# Altium PCB Vario_pcb_2l.PcbDoc (part 1 of 2)
Units mil, origin at the board's own origin, x right, y up, seen from the top; angles counter-clockwise.
Board outline 2755.91 x 1968.5 mil, 2 copper layers (Top Layer, Bottom Layer), stack 34.296 mil thick; 124 components, 101 nets, 543 pads, 304 vias.
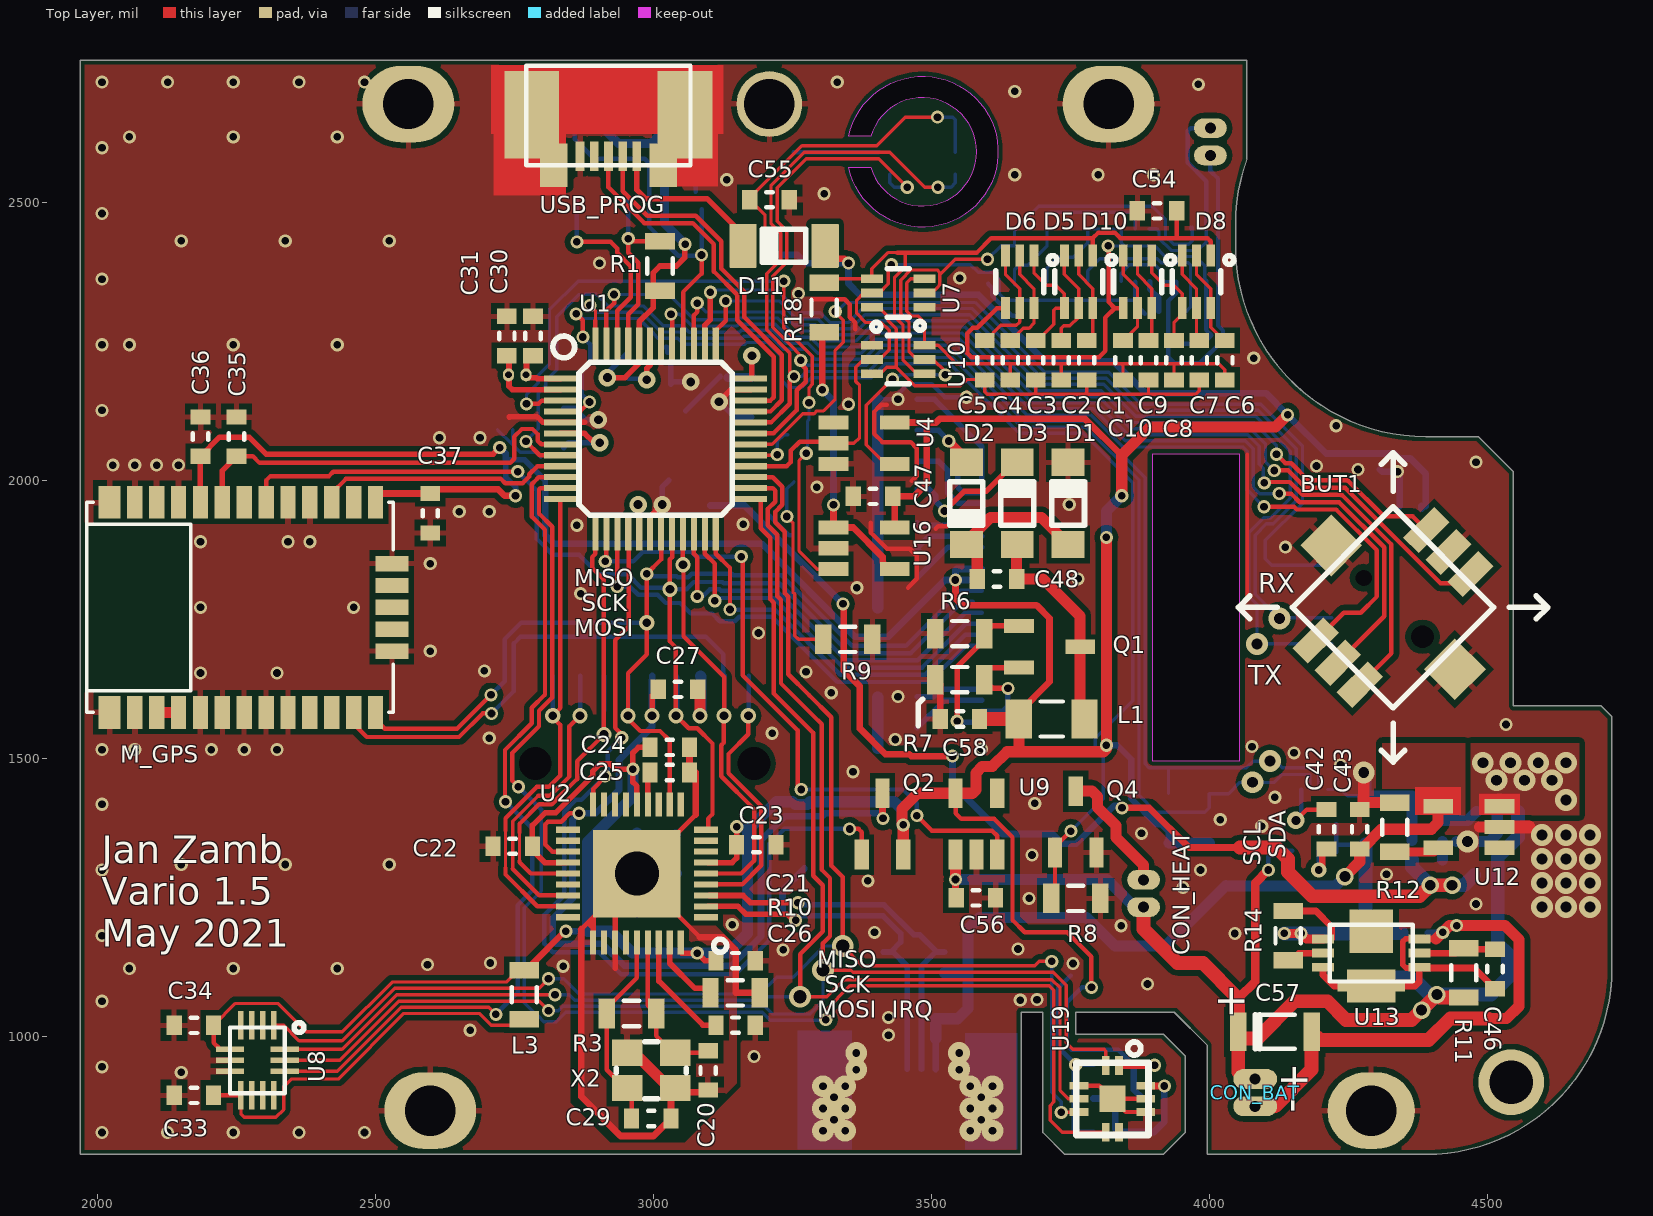
[diagram p0: Top Layer view]
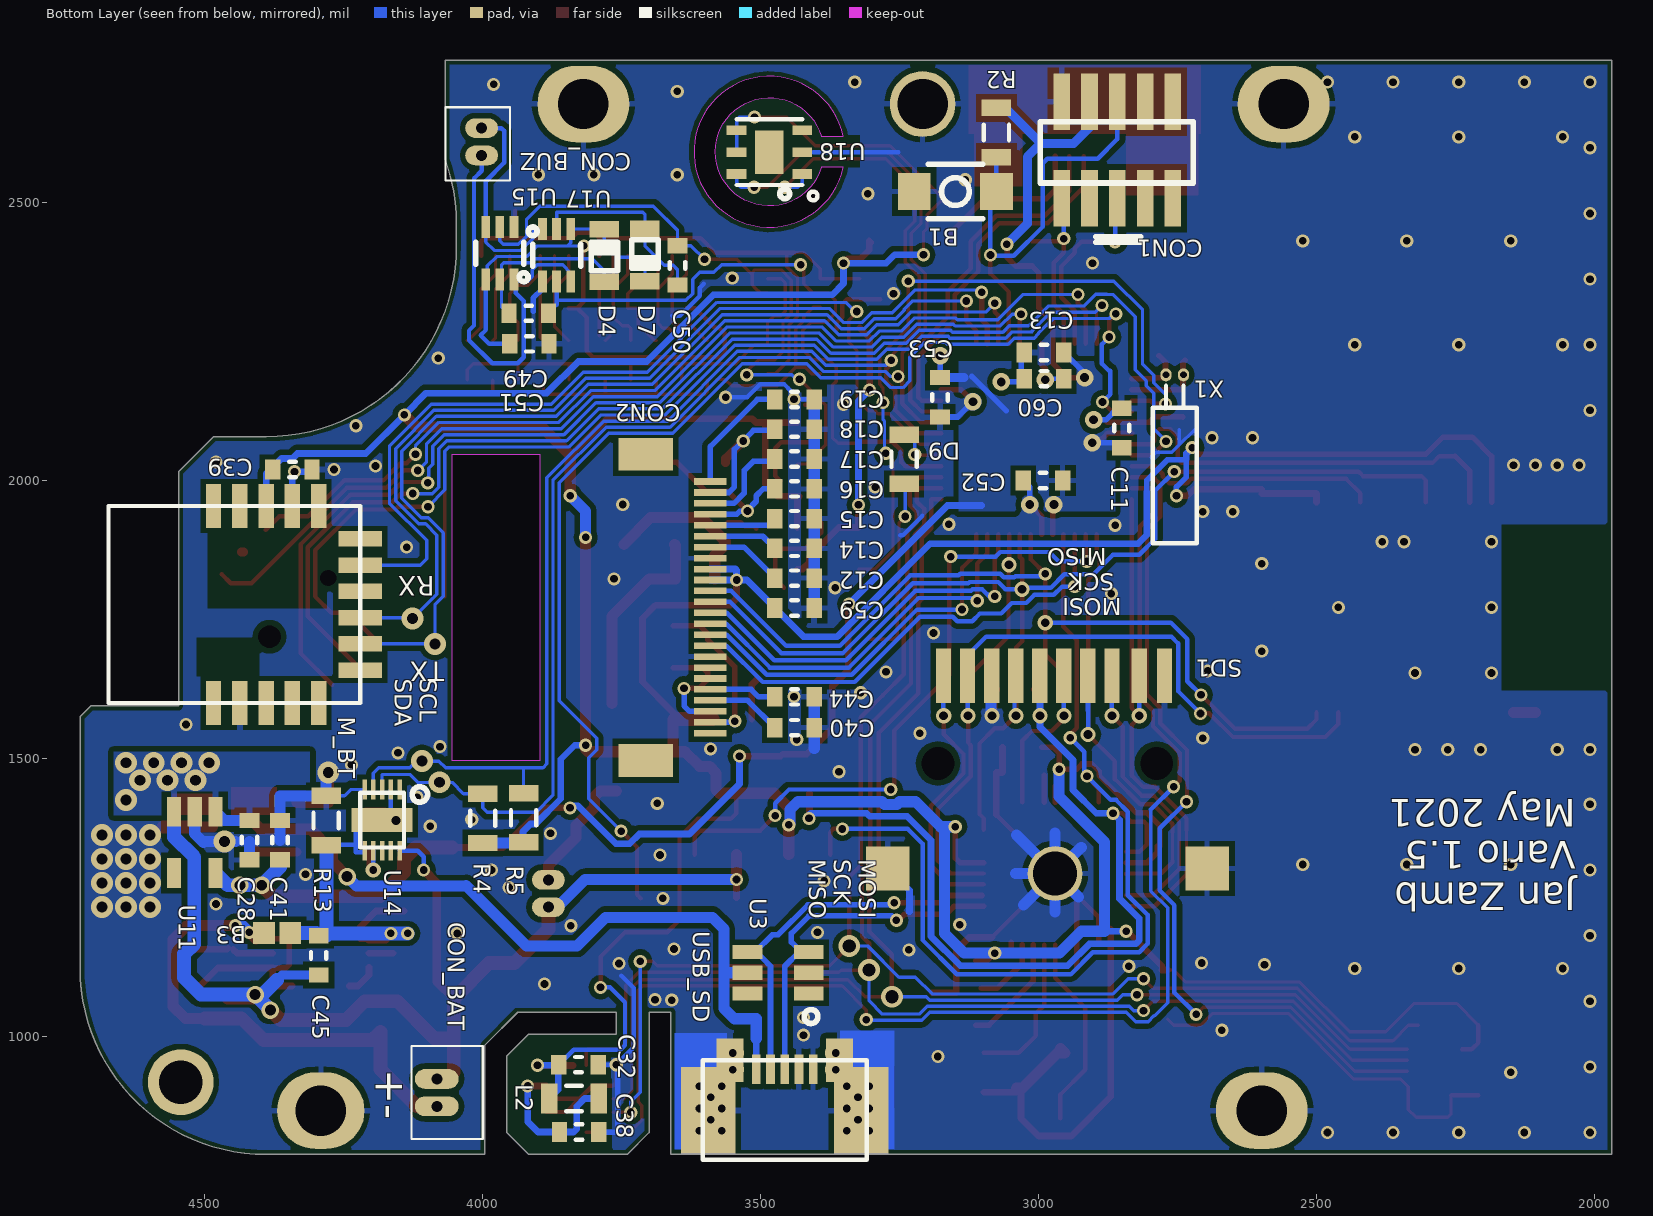
[diagram p1: Bottom Layer view, seen from below]
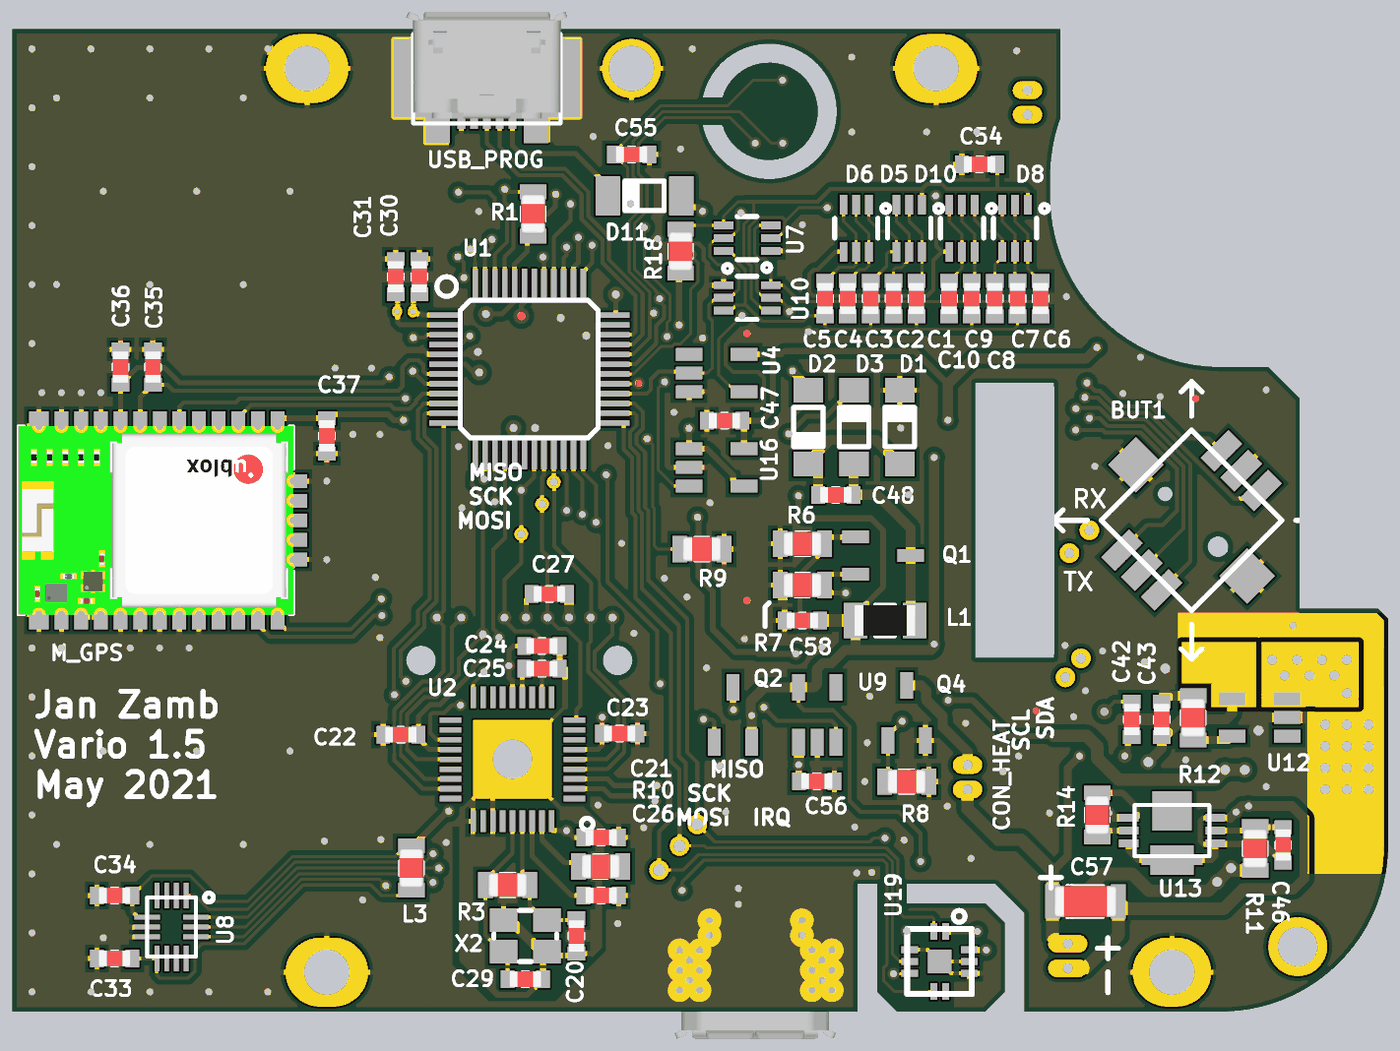
[diagram p3: 3D render of the assembled board from above, using the file's embedded part models]
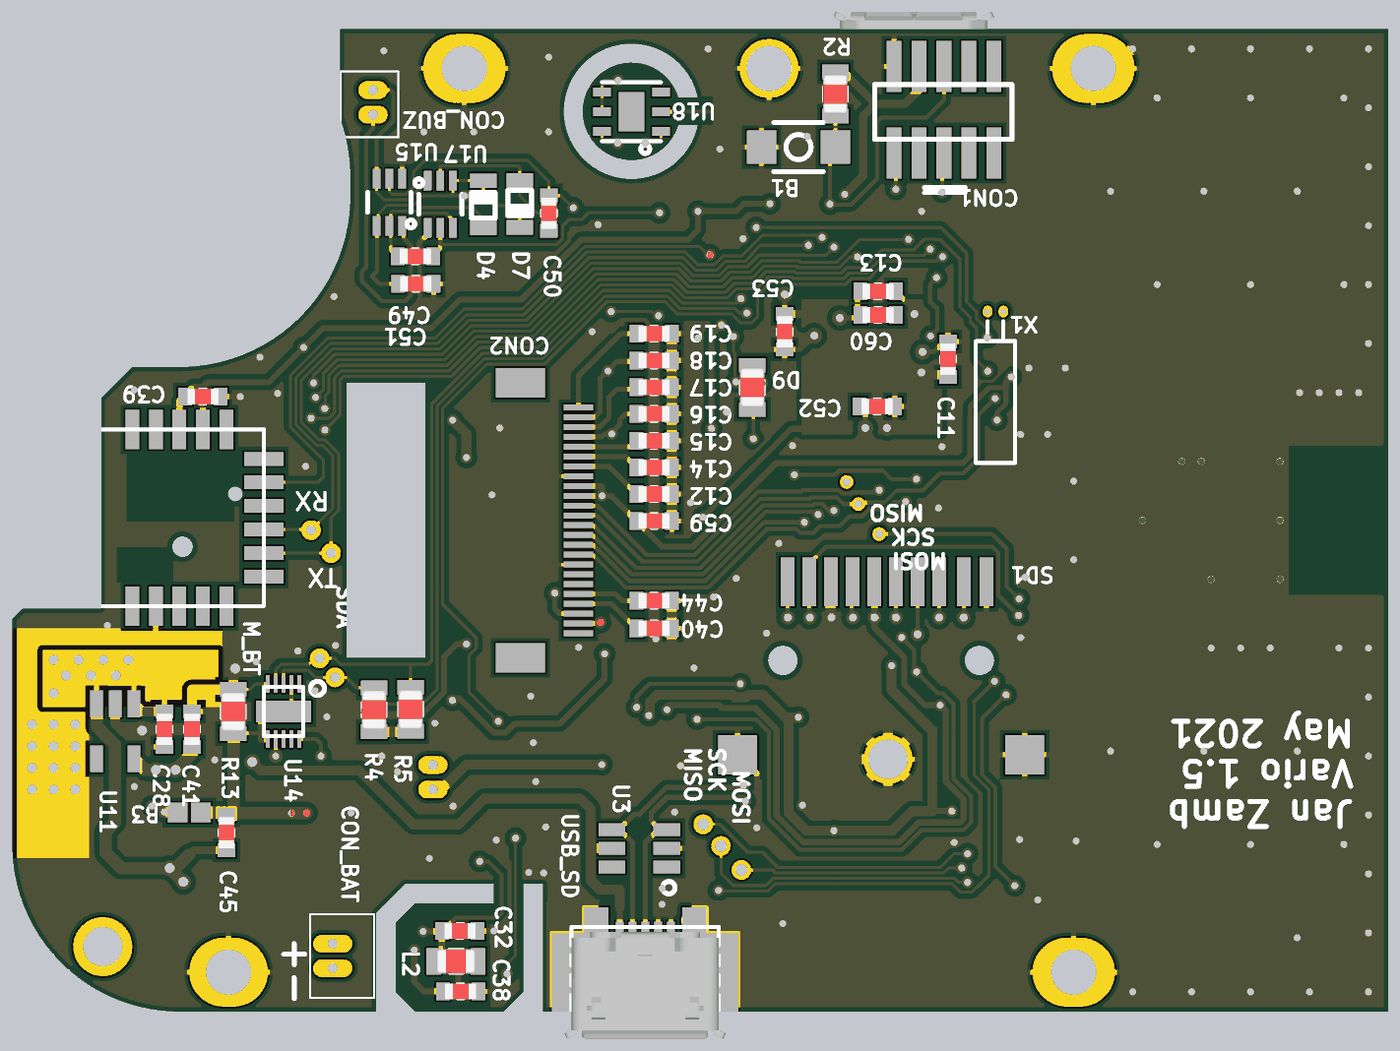
[diagram p4: 3D render of the assembled board from below, using the file's embedded part models]

## Layer stack, top to bottom
Top Solder: solder mask 0.4, Solder Resist, Dk 3.5
Top Layer: signal copper 1.4
Dielectric 1: core 31.4961, FR-4, Dk 4.2
Bottom Layer: signal copper 1.4
Bottom Solder: solder mask 0.4, Solder Resist, Dk 3.5

## Board outline
1968.5,787.4 3661.42,787.4 3661.42,1043.31 3700.79,1043.31 3700.79,826.77 3740.16,787.4 3917.32,787.4 3956.69,826.77 3956.69,964.57 3917.32,1003.94 3759.84,1003.94 3759.84,1043.31 3937.01,1043.31 3996.06,984.25 3996.06,787.4 4389.76,787.4 ccw(c4389.76,1122.05) 4724.41,1122.05 4724.41,1574.8 4704.72,1594.49 4547.24,1594.49 4547.24,2015.75 4484.25,2078.74 4389.76,2078.74 cw(c4389.76,2421.26) 4047.24,2421.26 4047.24,2460.63 cw(c4389.76,2460.63) 4067.9,2577.78 4067.9,2755.91 1968.5,2755.91
cut-out: 4055.12,2047.24 3897.64,2047.24 3897.64,1496.06 4055.12,1496.06
cut-out: 3390.7,2563.75 ccw(c3484.26,2591.29) 3390.7,2618.83 3351.33,2618.83 cw(c3484.26,2591.29) 3351.33,2563.75

## Design rules (kind name [scope] priority, off if disabled: settings)
AcuteAngle [All] p1: minimum=8.00000000000000E+0001 checktracksonly=FALSE
BoardOutlineClearance [All] p1: gap=8.27 except(0: Arc-SplitContinuation Track-SplitContinuation SMDPad-SplitContinuation THPad-SplitContinuation Via-SplitContinuation Fill-SplitContinuation Poly-SplitContinuation Region-SplitContinuation Text-SplitContinuation)
Clearance [All] p1: gap=5 except(10: Arc-Poly Track-Poly SMDPad-Poly THPad-Poly Via-Poly Fill-Poly Poly-Poly)
HoleSize [All] p1: absolutevalues=TRUE maxlimit=100 minlimit=7.87 maxpercent=80.000 minpercent=20.000
MinimumAnnularRing [All] p1: minimumring=3
PolygonConnect PolygonConnect_1 [IsVia] p1: connectstyle=Direct reliefconductorwidth=10 reliefentries=4 polygonreliefangle="90 Angle" airgapwidth=10
PolygonConnect [All] p2: connectstyle=Relief reliefconductorwidth=10 reliefentries=4 polygonreliefangle="90 Angle" airgapwidth=10
RoutingVias [All] p1: holewidth=13.78 width=23.62 viastyle="Through Hole" minholewidth=7.87 minwidth=17.72 maxholewidth=248.03 maxwidth=393.7
SolderMaskExpansion [All] p1: expansion=4
Width [All] p1: maxlimit=100 minlimit=5 preferedwidth=6 minimp=50.000000 maximp=50.000000 favimp=50.000000
29 further rules are at their usual default settings.

## Classes and differential pairs
component class Vario_sch: * *1 B1 BUT1 C1 C2 C3 C4 C5 C6 C7 C8 C9 C10 C11 C12 C13 C14 C15 C16 C17 C18 C19 C20 C21 C22 C23 C24 C25 C26 C27 C29 C30 C31 C40 C44 C47 C48 C49 C50 C51 C52 C53 C54 C58 C59 C60 CON1 CON2 CON6 CON7 CON11 CON12 CON_BUZ CON_HEAT D1 D2 D3 D4 D5 D6 D7 D8 D9 D10 D11 L1 Q1 Q2 Q4 R1 R2 R3 R4 R5 R6 R7 R8 R9 R10 R18 R? SD1 U1 U2 U3 U4 U7 U10 U15 U16 U17 USB_PROG USB_SD X1 X2
component class SensorsPower: B3 C28 C32 C33 C34 C35 C36 C37 C38 C39 C41 C42 C43 C45 C46 C55 C56 C57 CON_BAT L2 L3 M_BT M_GPS R11 R12 R13 R14 U8 U9 U11 U12 U13 U14 U18 U19

## Components (designator, comment, footprint, x,y, rotation, side; value= is the part's Value field where it differs from the comment)
B1 "OMRON B3U-1000PM" tlacitecko 3149.61,2519.68 r180 bottom
B3 "Short if LC05111 protection not used/present at battery pack" Solder_bridge_small 4370,1186 r0 bottom
BUT1 "SKRHABE010" SKRHABE010 4330.71,1771.65 r45 top
C1 "1u" cap0603 3779.43,2216.24 r270 top
C2 "1u" cap0603 3733.65,2216.24 r270 top
C3 "1u" cap0603 3687.87,2216.24 r270 top
C4 "1u" cap0603 3642.09,2216.24 r270 top
C5 "1u" cap0603 3596.32,2216.24 r270 top
C6 "1u" cap0603 4028,2216.24 r270 top
C7 "1u" cap0603 3982.22,2216.24 r270 top
C8 "1u" cap0603 3936.44,2216.24 r270 top
C9 "1u" cap0603 3890.67,2216.24 r270 top
C10 "1u" cap0603 3844.89,2216.24 r270 top
C11 "1u" cap0603 2850.39,2094.49 r270 bottom
C12 "1u 50V" cap0603 3438.98,1824.15 r0 bottom
C13 "1u" cap0603 2990.16,2230.32 r180 bottom
C14 "1u 50V" cap0603 3438.98,1877.73 r0 bottom
C15 "1u 50V" cap0603 3438.98,1931.32 r0 bottom
C16 "1u 50V" cap0603 3438.98,1984.91 r0 bottom
C17 "1u 50V" cap0603 3438.98,2038.5 r0 bottom
C18 "1u 50V" cap0603 3438.98,2092.08 r0 bottom
C19 "1u 50V" cap0603 3438.98,2145.67 r0 bottom
C20 "15p" cap0603 3098.43,938.63 r270 top
C21 "1u" cap0603 3148,1136 r180 top
C22 "1u" cap0603 2746.84,1341.91 r0 top
C23 "1u" cap0603 3185.04,1344.52 r180 top
C24 "1u" cap0603 3029.37,1519.87 r180 top
C25 "1u" cap0603 3029.37,1474.44 r180 top
C26 "1u" cap0603 3148,1020 r180 top
C27 "1u" cap0603 3044.29,1624.05 r180 top
C28 "1u" cap0603 4419.72,1352.8 r90 bottom
C29 "15p" cap0603 2996.06,852.02 r0 top
C30 "20p" cap0603 2783.46,2259.84 r90 top
C31 "20p" cap0603 2736.22,2259.84 r90 top
C32 "1u" cap0603 3827.76,948.82 r0 bottom
C33 "1u" cap0603 2173.23,893.7 r0 top
C34 "1u" cap0603 2173.23,1019.68 r0 top
C35 "1u" cap0603 2250,2078.74 r270 top
C36 "1u" cap0603 2185.04,2078.74 r90 top
C37 "1u" cap0603 2598.43,1940.94 r270 top
C38 "1u" cap0603 3826.53,827.67 r0 bottom
C39 "1u" cap0603 4342.52,2019.68 r180 bottom
C40 "1u 50V" cap0603 3438.98,1555.12 r0 bottom
C41 "1u" cap0603 4364.61,1352.8 r270 bottom
C42 "1u" cap0603 4211.06,1372.48 r270 top
C43 "1u" cap0603 4270.67,1372.48 r270 top
C44 "1u 50V" cap0603 3438.98,1610.67 r0 bottom
C45 "1u" cap0603 4295.28,1145.67 r270 bottom
C46 "1u" cap0603 4514,1121 r90 top
C47 "1u" cap0603 3394.91,1971.37 r0 top
C48 "1u 50V" cap0603 3618.11,1822.83 r180 top
C49 "10n" cap0603 3917.19,2300.81 r180 bottom
C50 "10n" cap0603 3649.61,2387.07 r90 bottom
C51 "1u" cap0603 3916.19,2245.81 r180 bottom
C52 "1u" cap0603 2992.13,2000 r0 bottom
C53 "1u" cap0603 3177.17,2149.61 r90 bottom
C54 "1u" cap0603 3906,2485 r180 top
C55 "1u" cap0603 3209,2505 r180 top
C56 "1u" cap0603 3580,1249 r180 top
C57 "bigass ceramic or tantalum, 5V min" CAP1206 4118.11,1007.87 r0 top
C58 "1u" cap0603 3551.18,1570.87 r0 top
C59 "1u" cap0603 3438.98,1770.56 r0 bottom
C60 "1u" cap0603 2990.16,2183.07 r180 bottom
CON1 "5x2 1.27mm header, SMD" "2x5, 1.27, SMD" 2858.27,2594.49 r180 bottom
CON2 "E-ink PFC" "24 way PFC connector" 3600.39,1771.65 r270 bottom
CON_BAT "2pin picoblade connector" "1x2, 1.25"#1 4082.68,874.02 r90 top
CON_BUZ "1x2 Header, 1.25mm" "1x2, 1.25"#2 4001.97,2584.65 r90 bottom
CON_HEAT "1x2 Header, 1.25" "1x2, 1.25"#2 3881.89,1232.28 r90 top
D1 "MBR0530" MiniMELF#1 3746.06,1958.64 r180 top
D2 "MBR0530" MiniMELF#1 3562.99,1958.64 r0 top
D3 "MBR0530" MiniMELF#1 3654.53,1958.64 r180 top
D4 "2V7 zener" Micromelf 3781.19,2404.81 r0 bottom
D5 "BAT54TW" SC70 3765,2357.24 r180 top
D6 "BAT54TW" SC70 3659,2357.24 r180 top
D7 "2V7 zener" Micromelf 3708.19,2405.81 r180 bottom
D8 "BAT54TW" SC70 3977,2357.24 r180 top
D9 "LED" cap0805 3242,2038 r270 bottom
D10 "BAT54TW" SC70 3871,2357.24 r180 top
D11 "MBR0530" MiniMELF#2 3235,2422 r270 top
L1 "FASTRON 1210F-680K-01" res1206 3716.54,1570.87 r0 top
L2 "600R 0805 ferrite bead" cap0805 3835.7,888 r0 bottom
L3 "600R 0805 ferrite bead" cap0805 2767.72,1074.8 r90 top
M_BT "RN4871" RN4871 4220.47,1599.61 r90 bottom
M_GPS "CAM-M8" CAM 2275.59,1771.65 r90 top
Q1 "NDS355" sot23-3 3712.6,1700.79 r270 top
Q2 "DMP2305" sot23-3 3412,1382 r0 top
Q4 "NDS355" sot23-3 3759.84,1385.83 r0 top
R1 "2k2" cap0805 3011.81,2385.83 r270 top
R2 "2k2" cap0805 3075.79,2625.98 r90 bottom
R3 "1Meg" cap0805 2960.63,1040.99 r0 top
R4 "2k2" cap0805 4000,1392 r270 bottom
R5 "2k2" cap0805 3926.63,1393 r270 bottom
R6 "12k" cap0805 3551.18,1724.41 r180 top
R7 "3R" cap0805 3551.18,1641.73 r180 top
R8 "12k" cap0805 3759.84,1248.03 r0 top
R9 "2k2" cap0805 3349.71,1714 r180 top
R10 "12k 1%" cap0805 3147,1078 r0 top
R11 "680r" cap0805 4458,1114 r270 top
R12 "2k2" cap0805 4333.66,1375.98 r270 top
R13 "0R039" cap0805 4281.93,1388.23 r270 bottom
R14 "1k" cap0805 4141.73,1181.1 r270 top
R18 "10R" cap0805 3307,2311 r90 top
SD1 "microSD slot ATTEND 112I-TDAR-R" microSD_slot 3180.94,1301.92 r180 bottom locked
U1 "SAM D21G" "48QFP 0.5mm" 3003.94,2074.8 r0 top
U2 "USB2244" qfn36 2970.31,1292.79 r180 top
U3 "USBLC6-4" sot23-6 3468.5,1114.17 r90 bottom
U4 "NC7S14" sot23-5 3379.17,2066.84 r270 top
U7 "NX3008CBKS" SC70 3440.32,2337.22 r90 top
U8 "BMX160" "LGA14 3*2.5" 2287.4,956.69 r270 top
U9 "NCP718 3V3" sot23-5 3581,1382 r0 top
U10 "NX3008CBKS" SC70 3440.32,2217.41 r270 top
U11 "NCP718 3V3" sot23-5 4518.15,1348.86 r0 bottom
U12 "MCP73831" sot23-5 4466.97,1376.42 r90 top
U13 "LC05111" wdfn6_dual_flag 4291.34,1149.61 r270 top
U14 "MAX17055" tdfn10_ep 4181.1,1388.78 r0 bottom
U15 "NX3008CBKS" SC70 3969.19,2408.81 r0 bottom
U16 "MCP6001" sot23-5 3379.17,1877.87 r270 top
U17 "NX3008CBKS" SC70 3867.11,2405.08 r180 bottom
U18 "si7021" dfn6 3484.25,2590.55 r0 bottom
U19 "LPS33" LPS33 3825.76,887.38 r270 top
USB_PROG "SMD micro USB" microusb_smd 2919,2583 r270 top
USB_SD "SMD micro USB" microusb_smd 3456.69,940.94 r90 bottom
X1 "ILSI 26-HX5F12.5-32.768KHZ" crystal 2755,2190 r0 bottom
X2 "SR PASSIVES 3225-24M-SR" "crystal 3.2x2.5" 2996.06,938.63 r0 top

## Footprints (in the part's own frame and the unit in brackets; to place one, negate y for a bottom-side part, rotate by r counter-clockwise, add the part's x,y. Pads: shape width x height; smd on the part's side, far side on the other; paste and mask are expansions set on the pad)
"1x2, 1.25"#1 [mm]
  oval 0.9x2 hole 0.5: 1(0,0) 2(1.25,0)
"1x2, 1.25"#2 [mm]
  oval 0.9x1.5 hole 0.5: 1(0,0) 2(1.25,0)
"2x5, 1.27, SMD" [mm]
  rect 0.76x2.6 smd: 1(-2.54,-2.204) 2(-1.27,-2.204) 3(0,-2.204) 4(1.27,-2.204) 5(2.54,-2.204) 6(2.54,2.204) 7(1.27,2.204) 8(0,2.204) 9(-1.27,2.204) 10(-2.54,2.204)
"24 way PFC connector" [mm]
  rect 0.3x1.5 smd: 1(-5.75,0.25) 2(-5.25,0.25) 3(-4.75,0.25) 4(-4.25,0.25) 5(-3.75,0.25) 6(-3.25,0.25) 7(-2.75,0.25) 8(-2.25,0.25) 9(-1.75,0.25) 10(-1.25,0.25) 11(-0.75,0.25) 12(-0.25,0.25) 13(0.25,0.25) 14(0.75,0.25) 15(1.25,0.25) 16(1.75,0.25) 17(2.25,0.25) 18(2.75,0.25) 19(3.25,0.25) 20(3.75,0.25) 21(4.25,0.25) 22(4.75,0.25) 23(5.25,0.25) 24(5.75,0.25)
  rect 1.5x2.5 smd: mount1(-7,-2.7) mount2(7,-2.7)
"48QFP 0.5mm" [mm]
  rect 1.5x0.28 smd: 1(-4.35,2.75) 2(-4.35,2.25) 3(-4.35,1.75) 4(-4.35,1.25) 5(-4.35,0.75) 6(-4.35,0.25) 7(-4.35,-0.25) 8(-4.35,-0.75) 9(-4.35,-1.25) 10(-4.35,-1.75) 11(-4.35,-2.25) 12(-4.35,-2.75) 25(4.35,-2.75) 26(4.35,-2.25) 27(4.35,-1.75) 28(4.35,-1.25) 29(4.35,-0.75) 30(4.35,-0.25) 31(4.35,0.25) 32(4.35,0.75) 33(4.35,1.25) 34(4.35,1.75) 35(4.35,2.25) 36(4.35,2.75)
  rect 0.28x1.5 smd: 13(-2.75,-4.35) 14(-2.25,-4.35) 15(-1.75,-4.35) 16(-1.25,-4.35) 17(-0.75,-4.35) 18(-0.25,-4.35) 19(0.25,-4.35) 20(0.75,-4.35) 21(1.25,-4.35) 22(1.75,-4.35) 23(2.25,-4.35) 24(2.75,-4.35) 37(2.75,4.35) 38(2.25,4.35) 39(1.75,4.35) 40(1.25,4.35) 41(0.75,4.35) 42(0.25,4.35) 43(-0.25,4.35) 44(-0.75,4.35) 45(-1.25,4.35) 46(-1.75,4.35) 47(-2.25,4.35) 48(-2.75,4.35)
  silkscreen extent -4.7,-3.5 3.5,4.7, body extent -3.5,-3.5 3.5,3.5, height 1.2
CAM [mm] "u-blox CAM GNSS antenna module"
  rect 1.5x0.7 smd: 1(4.8,-5.7) 2(4.8,-4.7) 3(4.8,-3.7) 4(4.8,-2.7) 5(4.8,-1.7) 6(4.8,-0.7) 7(4.8,0.3) 8(4.8,1.3) 9(4.8,2.3) 10(4.8,3.3) 11(4.8,4.3) 12(4.8,5.3) 15(-4.8,5.3) 16(-4.8,4.3) 17(-4.8,3.3) 18(-4.8,2.3) 19(-4.8,1.3) 20(-4.8,0.3) 21(-4.8,-0.7) 22(-4.8,-1.7) 23(-4.8,-2.7) 24(-4.8,-3.7) 25(-4.8,-4.7) 26(-4.8,-5.7)
  rect 1.5x1 smd: 13(4.8,6.45) 14(-4.8,6.45)
  rect 0.7x1.5 smd: 27(-2,-6.45) 28(-1,-6.45) 29(0,-6.45) 30(1,-6.45) 31(2,-6.45)
  Multi-Layer pour cut-out: -3.8,7.5 -3.8,2.75 3.8,2.75 3.8,7.5
  silkscreen extent -4.8,-6.5 4.8,7.5, body extent -4.8,-6.5 4.8,7.5, height 1.97
cap0603 [mm] "Chip Capacitor, 2-Leads, Body 1.6x0.8mm, IPC Medium Density"
  rect 0.7x0.9 smd: 1(-0.9,0) 2(0.9,0)
  silkscreen extent -0.15,-0.35 0.15,0.35, body extent -0.8,-0.4 0.8,0.4, height 0.3
cap0805 [mm] "Chip Capacitor, 2-Leads, Body 2.0x1.2mm, IPC Medium Density"
  rect 0.75x1.35 smd: 1(-1.125,0) 2(1.125,0)
  silkscreen extent -0.35,-0.58 0.35,0.58, body extent -1,-0.62 1,0.63, height 0.78
CAP1206 [mm] "Chip Capacitor, 2-Leads, Body 3.2x1.6mm, IPC Medium Density"
  rect 0.75x1.75 smd: 1(-1.675,0) 2(1.675,0)
  silkscreen extent -0.9,-0.77 0.9,0.77, body extent -1.6,-0.8 1.6,0.8, height 1
crystal [mm]
  oval 0.5x0.6 hole 0.3: 1(-0.4,0) 2(0.4,0)
  silkscreen extent -1,0.5 1,7.7, body extent -1.1,-0.13 1,7.7, height 2.15
"crystal 3.2x2.5" [mm]
  rect 1.4x1.2 smd: 1(1.1,0.8) 2(-1.1,0.8) 3(-1.1,-0.8) 4(1.1,-0.8)
  silkscreen extent -1.6,-1.3 1.6,1.3, body extent -1.6,-1.3 1.6,1.3, height 0.8
dfn6 [mm]
  rect 1.3x2 smd: 0(0,0)
  rect 0.9x0.45 smd: 1(-1.5,1) 2(-1.5,0) 3(-1.5,-1) 4(1.5,-1) 5(1.5,0) 6(1.5,1)
  silkscreen extent -2.2,-1.5 1.5,2.2
"LGA14 3*2.5" [mm]
  rect 1.3x0.25 smd: 1(-1.6,0.75) 2(-1.6,0.25) 3(-1.6,-0.25) 4(-1.6,-0.75) 8(1.6,-0.75) 9(1.6,-0.25) 10(1.6,0.25) 11(1.6,0.75)
  rect 0.25x1.3 smd: 5(-0.5,-1.25) 6(0,-1.25) 7(0.5,-1.25) 12(0.5,1.25) 13(0,1.25) 14(-0.5,1.25)
  silkscreen extent -1.72,-1.25 1.5,2.12, body extent -1.5,-1.25 1.5,1.25, height 1
LPS33 [mm] "STmicro pressure sensor"
  rect 0.85x0.35 smd: 1(-1.525,0.3) 2(-1.525,-0.3) 6(1.525,-0.3) 7(1.525,0.3)
  rect 0.35x0.85 smd: 3(-0.6,-1.525) 4(0,-1.525) 5(0.6,-1.525) 8(0.6,1.525) 9(0,1.525) 10(-0.6,1.525)
  rect 1.2x1.2 smd: PAD(0,0)
  silkscreen extent -2.6,-1.65 1.65,1.65, body extent -1.65,-1.65 1.65,1.65, height 2.9
Micromelf [mm]
  rect 1.35x0.75 smd: A(0,1.2) K(0,-1.2)
  silkscreen extent -0.6,-0.6 0.6,0.7
microSD_slot [mm]
  rect 0.7x2.5 smd: 1(7.95,8.8) 2(6.85,8.8) 3(5.75,8.8) 4(4.65,8.8) 5(3.55,8.8) 6(2.45,8.8) 7(1.35,8.8) 8(0.25,8.8) CD1(9.2,8.8) CD2(10.35,8.8)
  rect 2x2 smd: fix(-2.3,0) fix(12.3,0)
  round 1 hole 1.5 unplated: hole(0,4.8) hole(10,4.8)
  body extent -1.65,-11.45 11.65,7.45, height 1.7
microusb_smd [mm]
  rrect1% 1.35x0.4 smd: 1(0,1.3) 2(0,0.65) 3(0,0) 4(0,-0.65) 5(0,-1.3)
  rrect1% 4x2.5 smd: 6(-1.9,3.5) 6(-1.9,-3.5)
  rrect1% 2x1.25 smd: 6(0.4,2.5) 6(0.4,-2.5)
  silkscreen extent -4.15,-3.75 0.4,3.75, body extent -5.28,-4.1 0.15,4.1, height 2.73
MiniMELF#1 [mm]
  rect 1.5x1.25 smd: A(0,1.875) K(0,-1.875)
  silkscreen extent -0.75,-1 0.75,1
MiniMELF#2 [mm]
  rrect5% 2x1.25 smd: A(0,1.875) K(0,-1.875)
  silkscreen extent -0.75,-1 0.75,1
qfn36 [mm]
  rect 1.1x0.28 smd: 1(-3.15,2) 2(-3.15,1.5) 3(-3.15,1) 4(-3.15,0.5) 5(-3.15,0) 6(-3.15,-0.5) 7(-3.15,-1) 8(-3.15,-1.5) 9(-3.15,-2) 19(3.15,-2) 20(3.15,-1.5) 21(3.15,-1) 22(3.15,-0.5) 23(3.15,0) 24(3.15,0.5) 25(3.15,1) 26(3.15,1.5) 27(3.15,2)
  rect 0.28x1.1 smd: 10(-2,-3.15) 11(-1.5,-3.15) 12(-1,-3.15) 13(-0.5,-3.15) 14(0,-3.15) 15(0.5,-3.15) 16(1,-3.15) 17(1.5,-3.15) 18(2,-3.15) 28(2,3.15) 29(1.5,3.15) 30(1,3.15) 31(0.5,3.15) 32(0,3.15) 33(-0.5,3.15) 34(-1,3.15) 35(-1.5,3.15) 36(-2,3.15)
  rrect1% 4x4 / inner round 2.5 / far side round 2.5 hole 2: PAD(0,0)
  silkscreen extent -4.1,3 -3.5,3.6, body extent -3,-3 3,3, height 0.85
res1206 [mm] "Chip Resistor, 2-Leads, Body 3.1x1.6mm, IPC Medium Density"
  rect 1.2x1.8 smd: 1(-1.5,0) 2(1.5,0)
  silkscreen extent -0.5,-0.8 0.5,0.8, body extent -1.55,-0.77 1.55,0.78, height 0.55
RN4871 [mm]
  rect 2x0.7 smd: 1(0,6.7) 2(0,5.5) 3(0,4.3) 4(0,3.1) 5(0,1.9) 12(9,1.9) 13(9,3.1) 14(9,4.3) 15(9,5.5) 16(9,6.7)
  rect 0.7x2 smd: 6(1.5,0) 7(2.7,0) 8(3.9,0) 9(5.1,0) 10(6.3,0) 11(7.5,0)
  Top Layer pour cut-out: 1.2,7.5 3,7.5 3,4.6 1.2,4.6
  Top Layer pour cut-out: 4.3,7 7.8,7 7.8,1.5 4.3,1.5
  silkscreen extent 0,0 9,11.5, body extent 0,0 9,11.5, height 2.1
SC70 [mm]
  rect 0.4x1 smd: 1(-0.65,-1.2) 2(0,-1.2) 3(0.65,-1.2) 4(0.65,1.2) 5(0,1.2) 6(-0.65,1.2)
  silkscreen extent -1.7,-1.2 1.1,0.5, body extent -1.1,-0.8 1.1,0.8, height 1
SKRHABE010 [mm] "multidirectional switch"
  rect 2x1 smd: 1(-3.575,1.425) 2(-3.575,0) 3(-3.575,-1.425) 4(3.575,1.425) 5(3.575,0) 6(3.575,-1.425)
  rect 2x2 smd: 7(0,4) 8(0,-4)
  round 0.254 hole 0.75 unplated: 9(0,1.9)
  round 0.254 hole 1.05 unplated: 10(0,-1.9)
  silkscreen extent -5,-5 5,5, body extent -3.25,-3.25 3.25,3.25, height 5
Solder_bridge_small [mm]
  rect 1x1 smd: 1(0.6,0) 2(-0.6,0)
sot23-3 [mm]
  rect 0.65x1.36 smd: 1(-0.95,-1.4) 2(0.95,-1.4) 3(0,1.4)
  body extent -1.5,-0.8 1.5,0.8, height 1
sot23-5 [mm]
  rect 0.65x1.36 smd: 1(-0.95,-1.4) 2(0,-1.4) 3(0.95,-1.4) 4(0.95,1.4) 5(-0.95,1.4)
  body extent -1.5,-0.8 1.5,0.8, height 1
sot23-6 [mm]
  rect 0.65x1.36 smd: 1(-0.95,-1.4) 2(0,-1.4) 3(0.95,-1.4) 4(0.95,1.4) 5(0,1.4) 6(-0.95,1.4)
  silkscreen extent -2.32,-1.82 -1.68,-1.18, body extent -1.5,-0.8 1.5,0.8, height 1
tdfn10_ep [mm]
  rect 0.2x0.9 smd: 1(-0.8,-1.4) 2(-0.4,-1.4) 3(0,-1.4) 4(0.4,-1.4) 5(0.8,-1.4) 6(0.8,1.4) 7(0.4,1.4) 8(0,1.4) 9(-0.4,1.4) 10(-0.8,1.4)
  rect 2.8x1.1 smd: PAD(0,0)
  silkscreen extent -2.08,-1.53 1,1.25, body extent -1,-1.25 1,1.25, height 1
tlacitecko [mm] "B3U-1000PM"
  rect 1.5x1.7 smd: 1(-1.878,0) 2(1.878,0)
  silkscreen extent -1.25,-1.25 1.25,1.25
wdfn6_dual_flag [mm]
  rect 0.4x1 smd: 1(-0.65,-2.2) 2(0,-2.2) 3(0.65,-2.2) 4(0.65,2.2) 5(0,2.2) 6(-0.65,2.2)
  rect 2x2 smd: PAD1(-1,0)
  rect 0.5x0.5 smd: PAD2(1.5,1.3) PAD2(1.5,-1.3)
  rect 1.5x2.2 smd: PAD2(1.5,0)
  silkscreen extent -1.3,-1.9 1.3,1.9, body extent -1.3,-1.9 1.3,1.9, height 1

## Part data
B1: library part button
B3: library part Solder_bridge, "Solder bridge"
BUT1: "5-way joystick"
C1 C2 C3 C4 C5 C6 C7 C8 C9 C10 C11 C12 C13 C14 C15 C16 C17 C18 C19 C20 C21 C22 C23 C24 C25 C26 C27 C28 C29 C30 C31 C32 C33 C34 C35 C36 C37 C38 C39 C40 C41 C42 C43 C44 C45 C46 C47 C48 C49 C50 C51 C52 C53 C54 C55 C56 C58 C59 C60: library part Cap, "0603"
C57: library part Cap, "1206"
CON1: library part "5x2 1.27mm", "programming connector for uC"
CON2: "OMRON XF2W24151AR100"
CON_BAT CON_BUZ: library part "1x2 Header, 2.54"
CON_HEAT: library part "1x2 Header, 2.54", "90deg angle"
D1 D2 D3 D11: library part DB27308, "SOD-123 shottky diode"
D4 D7: library part DB27308, "micromelf"
L1: library part Inductor1, "1210F-680K-01"
L2 L3 R1 R2 R3 R4 R5 R6 R7 R8 R9 R10 R11 R12 R13 R14 R18: library part Resistor1, "0805"
M_BT: "bluetooth module"
M_GPS: "u-blox CAM GNSS antenna module"
Q1 Q4: library part BSS138, "N-FET transistor"
Q2: library part NX3008, "P-FET transistor"
SD1: library part "microSD slot", "ATTEND 112I-TDAR-R"
U1: "Atmel ARM M0+ uC"
U2: "SD card reader"
U3: "ESD protection"
U4: library part SN74LVC1G04DBVR, "SOT23-5 single Inverter"
U7 U10 U15 U17: "SC70 N/P dual mos"
U8: "IMU mems unit"
U9 U11: library part "LDLN025 LDO", "SOT23 3.3V LDO regulator"
U12: "SOT23 linear battery charging controller"
U13: "Battery protection circuit"
U14: "Battery monitoring gauge"
U16: library part MCP601, "SOT23 R-R opamp"
U18: library part SHT21, "temp and humidity sensor"
U19: "barometer"
USB_PROG USB_SD: library part "micro USB"
X1: library part Crystal
X2: library part Crystal_smd

## Free pads (board coordinates)
  oval 165.35x137.8 hole 90.55: 2(2598.43,866.14) 3(2559.06,2677.17) 3(3818.9,2677.17)
  round 118.11 hole 90.55: 3(3208.66,2677.17)
  oval 157.48x137.8 hole 90.55: 3(4291.34,866.14)
  round 118.11 hole 78.74 unplated: 3(4543.31,917.32)

## Via types
v1: diameter 23.62, hole 13.78, Top Layer to Bottom Layer, tented both sides, 227 vias
v2: diameter 39.37, hole 19.68, Top Layer to Bottom Layer, tented both sides, 22 vias
v3: diameter 39.37, hole 13.78, Top Layer to Bottom Layer, 20 vias
v4: diameter 31.5, hole 15.75, Top Layer to Bottom Layer, tented both sides, 10 vias
v5: diameter 27.56, hole 15.75, Top Layer to Bottom Layer, tented both sides, 9 vias
v6: diameter 31.5, hole 19.68, Top Layer to Bottom Layer, tented both sides, 5 vias
v7: diameter 39.37, hole 19.68, Top Layer to Bottom Layer, 4 vias
v8: diameter 39.37, hole 23.62, Top Layer to Bottom Layer, 3 vias
v9: diameter 27.56, hole 15.75, Top Layer to Bottom Layer, 3 vias
v10: diameter 27.56, hole 13.78, Top Layer to Bottom Layer, tented both sides, 1 vias

## Nets (pads, with @x,y where several pads share a name; then routed paths per layer and width w, separated by ;. In a path a pad name is that pad's centre, name@x,y a point inside that pad or via, vN(x,y) a via of type N, cw(c..) or ccw(c..) an arc to the next point about the centre after c; other vN are vias at no path point)
1V8: C60.2 U1.43 | length 101.7
  Top Layer w10: v4(2988.18,2181.1) 2988.19,2201.77 2994.09,2207.68 U1.43@2994.09,2246.06
  Bottom Layer w8: C60.2@2954.72,2183.07 2986.21,2183.07 v4(2988.18,2181.1)
3V3: C11.2 C13.2 C41.2 C52.1 C53.2 CON1.9 R1.2 R2.2 U1.6 U1.17 U1.36 U1.44 U11.5 | length 3265.6
  Top Layer w10: U1.6@2832.68,2084.65 2875.98,2084.65 2892.72,2067.91 v4(2903.54,2067.91) ; v4(2917.32,2185.04) 2948.82,2185.04 2974.41,2210.63 U1.44@2974.41,2246.06 2974.41,2285.43 3000,2311.02 3000,2374.02 3011.81,2385.83 3041.34,2385.83 3056.1,2400.59 3056.1,2424.1 v1(3057,2425) ; v4(2972.44,1956.69) 2974.41,1954.72 U1.17@2974.41,1903.54 ; U1.36@3175.2,2183.07 3177.17,2185.04 v4(3177.17,2224.41)
  Top Layer w12: v1(3341,1778) 3342.69,1776.31 3342.69,1658 3371.37,1629.32 3371.37,1553.63 3417.5,1507.5 3460.5,1507.5 3464,1504 v1(3538,1504) ; v1(3843,1411) 3892.15,1411 3963.49,1339.66 4055,1339.66
  Top Layer w25: 4055,1339.66 4120.97,1339.66 4141.73,1318.9 4141.73,1295.28 4185.04,1251.97 4377.95,1251.97 v6(4397.64,1271.65) v6(4437.01,1271.65)
  Bottom Layer w10: C11.2@2838.58,2059.06 2847.44,2067.91 v4(2903.54,2067.91) ; v4(2917.32,2185.04) 2917.32,2192.91 C13.2@2954.72,2230.32 ; 3058.07,2125 3120.08,2187.01 ; C53.2@3177.17,2185.04 v4(3177.17,2224.41)
  Bottom Layer w12: 3102,1955 3164,1955 v1(3341,1778) ; v1(3538,1504) 3538,1454 3628,1364 3718.3,1364 3736,1346.3 3760.45,1346.3 3829.15,1415 3839,1415 v1(3843,1411) ; U11.5@4476.81,1289.8 U11.5@4480.75,1293.74
  Bottom Layer w16: CON1.9@2908.27,2681.26 2908.27,2635.04 2937.01,2606.3 2996.06,2606.3 ; v1(3057,2425) 3020,2462 3020,2582.36 2996.06,2606.3 ; R2.2@3075.79,2670.28 3060.04,2670.28 2996.06,2606.3 ; 3133.86,2185.04 C53.2@3177.17,2185.04
  Bottom Layer w25: C41.2@4364.61,1317.36 4364.61,1304.69 v6(4397.64,1271.65) v6(4437.01,1271.65) 4458.66,1271.65 U11.5@4476.81,1289.8
3V3_SW: C21.2 C22.2 C23.2 C24.2 C32.2 C34.2 C36.1 C37.1 C39.1 C47.2 C55.2 C58.2 C59.2 CON2.9 CON2.10 D11.A L1.1 L2.2 L3.2 M_BT.14 M_GPS.1 M_GPS.9 Q2.2 R4.2 R5.2 U2.6 U2.14 U2.22 U2.36 U4.5 U8.5 U9.5 U16.5 U18.4 U18.5 U19.1 | length 10888.8
  Top Layer w6: C34.2@2208.66,1019.68 2248.03,1059.06 2323.94,1059.06 2375,1008 2440.22,1008 2529.83,1097.61 2735.41,1097.61 2756.89,1119.09 L3.2@2767.72,1119.09 ; v1(3207,2406) 3207,2447.65 3200.65,2454 3200.65,2477.91 C55.2@3173.57,2505 3173.57,2508.68 3267.25,2602.36 3401.57,2602.36 3452.76,2653.54 v1(3511.14,2653.54)
  Top Layer w8: C34.2@2208.66,1019.68 2208.66,988.19 2220.47,976.38 U8.5@2238.19,976.38 ; U9.5@3543.6,1437.12 3543.6,1401.4 3554,1391 3612.94,1391 3646,1357.94 3646,1209 3667.99,1187.01 3744.09,1187.01 3788,1143.1 v1(3788,1088)
  Top Layer w10: M_GPS.9@2185.04,1960.63 C36.1@2185.04,2043.31 2219.65,2077.91 2272.48,2077.91 2303.15,2047.24 2711.61,2047.24 v1(2723.43,2059.06) ; C22.2@2782.28,1341.91 2782.28,1379.28 2805.03,1402.04 2824.19,1402.04 2882.01,1459.85 2882.01,1459.99 2891.19,1469.18 2891.19,1477.03 2903.97,1489.81 2922.03,1489.81 2931.53,1480.32 v1(2963.09,1480.32) ; C22.2@2786.77,1341.91 2786.77,1330.23 2804.53,1312.47 U2.22@2842.36,1312.47 ; U2.14@2970.31,1420.74 2970.31,1449.99 2963.09,1457.22 v1(2963.09,1480.32) ; C24.2@2993.94,1519.87 2972.87,1519.87 2963.09,1510.09 v1(2963.09,1480.32) ; U2.36@3049.05,1168.77 3049.05,1151.73 3051.18,1149.61 v1(3078.74,1149.61) 3092.35,1136 C21.2@3112.57,1136 ; U2.6@3098.27,1312.47 3141.73,1312.47 3149.61,1320.35 C23.2@3149.61,1344.52 3149.61,1376.61 v1(3150,1377)
  Top Layer w12: M_GPS.1@2500,1960.63 2500,1976.38 C37.1@2598.43,1976.38 2598.43,1984.25 2720.47,1984.25 2732.28,1972.44 v1(2751.97,1972.44) ; L3.2@2767.72,1119.09 L3.2@2778.54,1119.09 ; L3.2@2778.54,1126.97 2840.55,1188.98 v1(2842.52,1188.98) ; D11.A@3301.82,2428 3304.82,2431 3304.82,2414.18 3320,2399 3343,2399 v1(3351,2391) ; U16.5@3434.28,1915.27 3434.28,1967.43 C47.2@3430.35,1971.37 3468.92,1971.37 3491.55,1994 3491.55,2102.69 3490,2104.24 ; U4.5@3434.28,2104.24 3490,2104.24 ; v1(3543.31,1820.87) 3543.31,1787.4 3555.12,1775.59 3688.98,1775.59 3712.6,1751.97 3712.6,1637.8 3657.48,1582.68 L1.1@3657.48,1570.87 ; U19.1@3837.57,947.42 3901.16,947.42 v1(3901.57,947.83) ; 3842.51,2045 3776.7,2110.81 3514.87,2110.81 3508.31,2104.24 3490,2104.24
  Top Layer w16: L1.1@3649.61,1570.87 L1.1@3653.54,1566.93
  Top Layer w20: Q2.2@3449.4,1326.88 v1(3449.4,1380.42) 3447.19,1382.63 3447.19,1409.19 3475.12,1437.12 U9.5@3543.6,1437.12 3574.12,1437.12 3580.24,1443.24 3580.24,1473.76 3591.48,1485 3609.53,1485 3636.34,1511.81 3809.81,1511.81 3814.96,1516.96 v1(3814.96,1523.62) v1(3814.96,1897.64) ; 3657.48,1520.48 L1.1@3657.48,1570.87 ; v1(3842.51,1972.44) 3842.51,2045 3893.51,2096 4119,2096 v1(4141,2118)
  Top Layer w25: C58.2@3586.61,1570.87 L1.1@3649.61,1570.87
  Bottom Layer w6: v1(3511.14,2653.54) 3538.9,2653.54 3543.31,2649.14 U18.4@3543.31,2629.92 U18.5@3543.31,2590.55
  Bottom Layer w8: v1(3788,1088) 3771,1088 3744.09,1061.09 3744.09,983.61 3752.17,975.54 3836.47,975.54 C32.2@3863.19,948.82
  Bottom Layer w10: v1(2751.97,1972.44) 2751.97,1988.19 2734.09,2006.06 2734.09,2038.56 2735.09,2037.56 2764.94,2037.56 2765.43,2037.07 2768.49,2037.07 2805.35,2000.2 2805.35,1979.33
  Bottom Layer w12: v1(2723.43,2059.06) 2734.09,2048.39 2734.09,2038.56 ; 2805.35,1979.33 2805.35,1901.57 2820.69,1886.24 3194.76,1886.24 3362,1719 3422.85,1719 C59.2@3474.41,1770.56 3524.71,1820.87 v1(3543.31,1820.87) ; v1(2842.52,1188.98) 2881.29,1188.98 ; v1(3207,2406) 3259,2406 3274,2391 v1(3351,2391) 3351,2354.19 3371,2334.19 3584.81,2334.19 3705,2214 3828,2214 3885,2157 4102,2157 v1(4141,2118) 4210.6,2048.4 4333.49,2048.4 4342.52,2039.37 4362.2,2039.37 4389.76,2011.81 M_BT.14@4389.76,1953.94 ; CON2.10@3590.55,1820.87 v1(3543.31,1820.87) ; CON2.9@3590.55,1840.55 3545.28,1840.55 3543.31,1838.58 v1(3543.31,1820.87) ; v1(3814.96,1523.62) 3834.38,1523.62 3859.64,1498.36 3859.64,1427.36 3905,1382 3914,1382 3927.63,1368.37 R5.2@3927.63,1347.71 ; L2.2@3879.99,888 3864.17,903.82 3864.17,947.83 v1(3901.57,947.83) ; M_BT.14@4381.89,1948.82 M_BT.14@4381.89,1953.94
  Bottom Layer w20: v1(2963.09,1480.32) 2963.09,1431.59 2881.29,1349.79 2881.29,1188.98 2922.71,1188.98 2962.08,1149.61 v1(3078.74,1149.61) 3133.86,1149.61 3169.29,1185.04 3169.29,1370.08 3176.21,1377 ; v1(3150,1377) 3176.21,1377 ; v1(3449.4,1380.42) 3447.19,1382.63 3447.19,1407.81 3433,1422 3281.92,1422 3277.11,1417.19 3254.89,1417.19 3250.08,1422 3221.21,1422 3176.21,1377 ; v1(3814.96,1897.64) 3814.96,1944.89 v1(3842.51,1972.44) ; R5.2@3927.63,1347.71 R4.2@4000,1347.71
BARO_CS: U1.11 U19.6 | length 2401
  Top Layer w6: v1(3310,1030) 3310,1047.2 3353.61,1090.81 3712.34,1090.81 3720.47,1082.68 3720.47,881.79 3713.7,875.02 3713.7,848.98 3735.35,827.34 U19.6@3813.95,827.34
  Top Layer w8: v1(2757,1449) 2746,1460 2746,1509.62 2794.15,1557.76 2794.15,1585.63 2817.91,1609.39 2817.91,1916.66 2794.15,1940.42 2794.15,1983.78 2796.59,1986.22 U1.11@2832.68,1986.22
  Bottom Layer w6: 2798,1408 2798,1261.34 2767.72,1231.06 2767.72,1060.41 2791.29,1036.83 2792.43,1036.83 2802.9,1026.37 2825.58,1026.37 2842.27,1043.06 3195.96,1043.06 3210.01,1029 3309,1029 v1(3310,1030)
  Bottom Layer w8: v1(2757,1449) 2798,1408
BATT+: C28.2 C45.2 C56.2 C57.1 CON_BAT.2 CON_HEAT.1 R11.2 U9.1 U11.1 U11.3 U12.3 U14.10 | length 2349.8
  Top Layer w12: v1(3543.6,1282) 3543.6,1249.37 C56.2@3543.97,1249
  Top Layer w16: 4051.18,1069.01 4053.27,1069.01 4082.68,1098.43 4082.68,1275.59 v1(4106.3,1299.21)
  Top Layer w20: v1(3543.6,1282) U9.1@3543.6,1326.88
  Top Layer w25: CON_HEAT.1@3881.89,1232.28 3881.89,1192.91 3943.13,1131.67 3988.52,1131.67 4051.18,1069.01 4052.17,1068.03 C57.1@4052.17,996.06 ; CON_BAT.2@4082.68,923.23 4064.96,923.23 4052.17,936.02 C57.1@4052.17,996.06 ; R11.2@4458,1069.71 4414.54,1069.71 v6(4409.45,1074.8) 4363.96,1029.31 4246.28,1029.31 4212.6,1062.99 4153.54,1062.99 4086.61,996.06 C57.1@4052.17,996.06
  Bottom Layer w8: v1(4106.3,1299.21) 4106.3,1322.83 4117.13,1333.66 U14.10@4149.61,1333.66
  Bottom Layer w16: C45.2@4303.15,1110.24 4361.22,1110.24 4370.08,1101.38
  Bottom Layer w20: v1(3543.6,1282) 3816,1282 3865.72,1232.28 CON_HEAT.1@3881.89,1232.28 ; C28.2@4419.72,1388.23 4465,1388.23 U11.1@4480.75,1403.98
  Bottom Layer w25: 4370.08,1101.38 4396.65,1074.8 v6(4409.45,1074.8) ; v6(4381.89,1047.24) v6(4409.45,1074.8) ; U11.3@4555.55,1403.98 4555.55,1358.7 4519,1322.15 4519,1166.34 4537.4,1147.94 4537.4,1105.31 4506.89,1074.8 v6(4409.45,1074.8)
  other v2: 4641.73,1425.2 4517.06,1460.63 4566.93,1460.63 4616.8,1460.63 4492.13,1492.13 4541.99,1492.13 4591.86,1492.13 4641.73,1492.13
BATT-: B3.1 C46.1 C57.2 CON_BAT.1 U13.3 U13.4 U13.6 U13.PAD2 | length 1378.6
  Top Layer w10: U13.4@4377.95,1122.79 4354.21,1122.79 4348,1129 4348,1170 4353.2,1175.2 U13.6@4377.95,1175.2
  Top Layer w12: U13.3@4204.72,1124.02 4204.72,1110.24 4224.41,1090.55 U13.PAD2@4240.16,1090.55 ; U13.PAD2@4342.52,1090.55 4370.08,1090.55 4377.95,1098.43 4377.95,1122.79 4476.77,1122.79 C46.1@4514,1085.57 ; U13.6@4377.95,1175.2 4408.2,1175.2 4411.42,1175.2 ; v1(4420,1187) 4422,1187 v1@4434,1199
  Top Layer w20: 4408.2,1175.2 v1(4420,1187) 4432,1199 4434,1199 v1(4445,1199) 4532,1199 4557,1174 4557,1054 4535,1032 4501,1032
  Top Layer w25: CON_BAT.1@4082.68,874.02 4118.11,874.02 4184.06,939.96 C57.2@4184.06,1007.87 4198.82,993.11 4394.69,993.11 4433.57,1032 4501,1032
  Bottom Layer w12: B3.1@4393.62,1186 4419,1186 4420,1186 v1(4420,1187)
  Bottom Layer w20: v1@4419,1186 v1(4420,1187) 4432,1199 v1(4445,1199)
BATT-_PROT: B3.2 C42.1 C45.1 R13.2 R14.1 U13.1 U14.2 U14.6 U14.PAD | length 819.7
  Top Layer w8: v4(4155.94,1388.23) 4175.63,1407.91 C42.1@4211.06,1407.91
  Top Layer w12: R14.1@4141.73,1225.39 4191.93,1225.39 4220.47,1196.85 4220.47,1175.2 U13.1@4204.72,1175.2
  Top Layer w16: v1(4134.84,1185.04) v1(4165.35,1185.04) 4175.2,1175.2 U13.1@4204.72,1175.2
  Bottom Layer w8: U14.PAD@4165.35,1404.53 U14.2@4165.35,1443.9 ; U14.6@4212.6,1330.71 4228.35,1330.71 4228.35,1344.92 ; U14.PAD@4228.35,1381.89 4228.35,1344.92 ; R13.2@4280.94,1344.92 4228.35,1344.92
  Bottom Layer w25: v1(4134.84,1185.04) v1(4165.35,1185.04) C45.1@4280.94,1185.04 ; R13.2@4280.94,1344.92 C45.1@4280.94,1185.04 ; B3.2@4346.38,1186 4300.17,1186 C45.1@4295.28,1181.1 ; C45.1@4280.94,1185.04 4295.28,1185.04 C45.1@4295.28,1181.1 ; C45.1@4280.94,1185.04 4280.94,1181.1 C45.1@4295.28,1181.1
BT_RST: M_BT.10 U1.30 | length 1670.3
  Top Layer w6: U1.30@3175.2,2064.96 3213.41,2064.96 3268.63,2120.19 3288.21,2120.19 3288.37,2120.35 3289.28,2120.35 3293.96,2125.04 3306.04,2125.04 3326.81,2145.81 3326.81,2233.87 3341.57,2248.63 3341.57,2288.55 3327,2303.12 v1(3327,2304)
  Bottom Layer w6: v1(3327,2304) 3327,2300 3347.19,2320.19 3578.57,2320.19 3703.99,2194.77 3819.06,2194.77 3876.59,2137.24 4092.4,2137.24 4167.8,2061.85 4167.8,1959.06 4101,1892.26 4101,1859 4112.36,1847.64 M_BT.10@4220.47,1847.64
BUTTON_CENTER: BUT1.2 U1.8 | length 2321.3
  Top Layer w8: v1(2770.67,2070.37) 2770.67,2069.89 2795.29,2045.28 U1.8@2832.68,2045.28 ; v1@4125.98,1975.64 v1(4125.98,1976.38) 4147.18,1976.38 4162.88,1960.69 4233.54,1960.69 4314.69,1879.54 4314.69,1755.64 BUT1.2@4231.18,1672.13
  Bottom Layer w6: v1(2770.67,2070.37) 2793,2092.7 2793,2157 2806,2170 2806,2179 2826,2199 2826,2294.5 2866.14,2334.65 2877.49,2334.65 2877.62,2334.77 2897.51,2334.77 2918.54,2313.74 2982.38,2313.74 3018.08,2278.03 3052.87,2278.03 3063.99,2266.91 3154.96,2266.91 3158.22,2270.16 3214.6,2270.16 3237.94,2246.81 3277.76,2246.81 3295.57,2229 3373.59,2229 3398.77,2254.19 3551.23,2254.19 3676.65,2128.77 3791.72,2128.77 3849.25,2071.24 4065.06,2071.24 4079.12,2057.19 4079.12,2003.8 4079.12,1987.39 4090.72,1975.78 4125.39,1975.78 v1(4125.98,1976.38)
BUTTON_DOWN: BUT1.4 U1.39 | length 1585.9
  Top Layer w8: U1.39@3072.83,2246.06 3072.83,2297.24 3078.74,2303.15 v1(3078.74,2318.9) ; v1(4121,2047) 4137,2031 4147.72,2031 4178.72,2000 4248.03,2000 4248.34,1999.69 4249.7,1999.69 4313.68,1935.7 4365.7,1935.7 BUT1.4@4390.56,1910.85
  Bottom Layer w6: v1(3078.74,2318.9) 3094.61,2303.02 3138.13,2303.02 3138.26,2303.16 3228.84,2303.16 3252.19,2279.81 3291.43,2279.81 3309.24,2262 3359.92,2262 3385.11,2287.19 3564.9,2287.19 3690.32,2161.77 3805.39,2161.77 3862.92,2104.24 4078.73,2104.24 4121,2061.97 v1(4121,2047)
BUTTON_LEFT: BUT1.3 U1.41 | length 1860.2
  Top Layer w8: v1@3031.49,2303.14 v1(3031.49,2299.22) 3033.46,2297.24 U1.41@3033.46,2246.06 ; v1(4098.93,1995.59) 4100.52,1997.19 4144.76,1997.19 4167.95,1974 4237.26,1974 4237.58,1973.69 4238.93,1973.69 4327.69,1884.92 4327.69,1689.3 BUT1.3@4270.86,1632.46
  Bottom Layer w6: v1(3031.49,2299.22) 3047.24,2299.22 3068.55,2277.91 3150.41,2277.91 3153.66,2281.16 3219.15,2281.16 3242.5,2257.81 3282.32,2257.81 3300.13,2240 3369.03,2240 3394.22,2265.19 3555.79,2265.19 3681.2,2139.77 3796.28,2139.77 3853.81,2082.24 4069.62,2082.24 4090.12,2061.74 4090.12,2029.33 4097.19,2022.25 4097.19,1997.33 v1(4098.93,1995.59)
BUTTON_RIGHT: BUT1.6 U1.47 | length 1899.7
  Top Layer w8: U1.47@2915.35,2246.06 2915.35,2305.12 2929.13,2318.9 v1(2929.13,2334.65) ; v1(4117,2018) 4142.33,2018 4173.33,1987 4242.65,1987 4242.96,1986.69 4244.31,1986.69 4416,1815 4453.4,1815 BUT1.6@4469.9,1831.51
  Bottom Layer w6: v1(2929.13,2334.65) 3027.56,2334.65 3073.3,2288.91 3145.85,2288.91 3149.1,2292.16 3223.71,2292.16 3247.05,2268.81 3286.87,2268.81 3304.69,2251 3364.47,2251 3389.66,2276.19 3560.34,2276.19 3685.76,2150.77 3800.83,2150.77 3858.36,2093.24 4074.17,2093.24 4101.12,2066.3 4101.12,2033.88 v1(4117,2018)
BUTTON_UP: BUT1.1 U1.48 | length 1962.4
  Top Layer w6: v1(2885.83,2314.96) 2895.67,2305.12 2895.67,2287.4
  Top Layer w8: U1.48@2895.67,2246.06 2895.67,2287.4 ; v1(4098.43,1952.76) 4152.42,1952.76 4157.49,1947.69 4228.16,1947.69 4301.69,1874.15 4301.69,1791.31 4272.38,1762 4241.71,1762 BUT1.1@4191.51,1711.8
  Bottom Layer w6: v1(2885.83,2314.96) 2898.05,2302.74 2977.82,2302.74 3011.18,2269.38 3011.18,2268.34 3012.5,2267.03 3048.31,2267.03 3059.44,2255.91 3159.52,2255.91 3162.77,2259.16 3210.04,2259.16 3233.39,2235.81 3273.21,2235.81 3291.02,2218 3378.14,2218 3403.33,2243.19 3546.67,2243.19 3672.09,2117.77 3787.16,2117.77 3844.69,2060.24 4060.5,2060.24 4068.12,2052.63 4068.12,1982.83 4098.19,1952.76 v1(4098.43,1952.76)
BUZZER: C49.2 U1.28 U4.2 U7.5 U10.2 U17.2 | length 1219.1
  Top Layer w6: U4.2@3324.05,2066.84 3360.84,2066.84 3370.81,2076.81 3370.81,2171.19 3364,2178 3364,2204 3377.41,2217.41 U10.2@3393.08,2217.41 3406.41,2217.41 3424,2235 3424,2270 3410,2284 3381.84,2284 3365.39,2300.44 3365.39,2324.01 3378.61,2337.22 U7.5@3393.08,2337.22 3406.36,2337.22 3422.69,2353.55 3422.69,2376.73 3430,2384.03 3430,2386 v1(3428,2388)
  Top Layer w8: U1.28@3175.2,2025.59 3239.59,2025.59 3247,2033 3247,2053.81 3263,2069.81 3321.08,2069.81 U4.2@3324.05,2066.84
  Bottom Layer w6: v1(3428,2388) 3570.43,2388 3584,2374.43 3609.57,2374.43 3622.43,2361.57 3622.43,2336 3634.36,2324.08 3863.18,2324.08 3867.11,2328.02
  Bottom Layer w8: U17.2@3867.11,2357.83 3867.11,2328.02 3867.11,2316.45 C49.2@3883.76,2299.81
BUZZER_B: C50.2 U4.4 U7.2 U10.5 U15.2 | length 1256.9
  Top Layer w6: v1(3430,2182) 3383,2135 3383,2064 3417.56,2029.44 U4.4@3434.28,2029.44 ; U7.2@3487.57,2337.22 3500.61,2337.22 3510.32,2346.94 3510.57,2346.94 3515.25,2351.62 3515.25,2374 ; v1(3525,2190) 3525,2196 3503.59,2217.41 U10.5@3487.57,2217.41 3474.28,2217.41 3459.88,2231.81 3459.88,2284.89 3444.69,2300.07 3444.69,2360.31 3463.07,2378.68 3510.57,2378.68 3515.25,2374 ; v1(3601,2398) 3543.25,2398 3517.25,2372 3515.25,2374
  Bottom Layer w6: v1(3430,2182) 3436,2182 3444,2190 v1(3525,2190) ; v1(3601,2398) 3625.5,2422.5 C50.2@3649.61,2422.5 3649.61,2450.06 3692.91,2493.37 3897.64,2493.37 3921.26,2469.75 3921.26,2439.52 3935.96,2424.82 3962.94,2424.82 3969.19,2431.06 U15.2@3969.19,2456.06 ; U15.2@3966.19,2452.32 U15.2@3966.19,2456.06
BUZZER_B_HV: C50.1 D7.A U17.5 | length 351.1
  Bottom Layer w6: C50.1@3649.61,2351.64 3649.61,2379.2 3657.48,2387.07 3673.23,2387.07 3708.19,2422.03 D7.A@3708.19,2453.06 3708.19,2478.81 3711.75,2482.37 3867.11,2482.37 U17.5@3867.11,2452.32
BUZZER_HV: C49.1 D4.A U15.5 | length 310.7
  Bottom Layer w6: D4.A@3781.19,2357.57 3781.19,2376.81 3803.19,2398.81 3906.75,2398.81 3913.75,2391.81 3962.19,2391.81 3966.19,2387.81 3966.19,2311.38 C49.1@3954.62,2299.81
BUZZER_VDD: C51.1 D4.K D6.4 D7.K D10.4 U15.4 U17.4 | length 1207.5
  Top Layer w8: D6.4@3633.41,2310 3618,2310 3582.46,2274.46 3574.87,2274.46 3565,2264.59 3565,2229 3572,2222 3802,2222 3813,2233 3813,2293 3830,2310 ; v1(3818,2422) 3818,2423 3819,2422 3819,2321 3830,2310 ; D10.4@3845.41,2310 3830,2310
  Bottom Layer w6: D7.K@3708.19,2358.57 3708.19,2382.81 3727.19,2401.81 3755.19,2401.81 3781.19,2427.81 D4.K@3781.19,2452.06 3781.45,2452.32 U17.4@3841.52,2452.32 3841.52,2427.48 3847.19,2421.81 ; v1(3818,2422) 3818.19,2421.81 3847.19,2421.81 ; U15.4@3991.78,2361.57 3991.78,2386.22 3975.18,2402.82 3921.26,2402.82 3902.27,2421.81 3847.19,2421.81
  Bottom Layer w8: C51.1@3951.62,2245.81 3988.66,2245.81 4003.93,2261.08 3994.19,2270.82 3994.19,2359.16 U15.4@3991.78,2361.57
D1+: C1.1 D5.2 D5.6 | length 166.9
  Top Layer w6: D5.2@3765,2404.49 3765,2370.59 3790.59,2345 D5.6@3790.59,2310 C1.1@3790.59,2260.2 ; C1.1@3770.91,2260.2 C1.1@3779.43,2251.68
D1-: C6.1 D8.2 D8.6 | length 174.8
  Top Layer w6: D8.2@3977,2404.49 3977,2370.59 4002.59,2345 D8.6@4002.59,2310 4002.59,2275.65 4026.57,2251.68 C6.1@4028,2251.68
D2+: C2.1 D5.3 D5.5 | length 182.8
  Top Layer w6: C2.1@3733.65,2251.68 3733.65,2273.65 3738,2278 3749,2278 3765,2294 D5.5@3765,2310 3765,2345 3739.41,2370.59 D5.3@3739.41,2404.49
D2-: C7.1 D8.3 D8.5 | length 165.6
  Top Layer w6: D8.3@3951.41,2404.49 3951.41,2370.59 3977,2345 D8.5@3977,2310 3977,2256.9 C7.1@3982.22,2251.68
D3+: C3.1 D5.4 D6.1 | length 217.5
  Top Layer w6: D6.1@3684.59,2404.49 3684.59,2373.41 3707,2351 3724,2351 3739.41,2335.59 D5.4@3739.41,2310 3724,2310 3720,2306 3720,2281 3690.68,2251.68 C3.1@3687.87,2251.68
D3-: C8.1 D8.4 D10.1 | length 191.7
  Top Layer w6: D10.1@3896.59,2404.49 3896.59,2373.41 3919,2351 3936,2351 3951.41,2335.59 D8.4@3951.41,2310 3951.41,2298.65 3936.44,2283.69 C8.1@3936.44,2251.68
D4+: C4.1 D6.2 D6.6 | length 187.8
  Top Layer w6: C4.1@3642.09,2251.68 3642.75,2251.68 3664.91,2273.83 3675.83,2273.83 3684.59,2282.59 D6.6@3684.59,2310 3684.59,2345 3659,2370.59 D6.2@3659,2404.49
D4-: C9.1 D10.2 D10.6 | length 165.9
  Top Layer w6: D10.2@3871,2404.49 3871,2370.59 3896.59,2345 D10.6@3896.59,2310 3896.59,2257.6 C9.1@3890.67,2251.68
D5+: C5.1 D6.3 D6.5 | length 206.6
  Top Layer w6: C5.1@3596.32,2251.68 3597.68,2251.68 3625,2279 3653,2279 3659,2285 D6.5@3659,2310 3659,2345 3633.41,2370.59 D6.3@3633.41,2404.49
D5-: C10.1 D10.3 D10.5 | length 174.7
  Top Layer w6: C10.1@3844.89,2251.68 3845.68,2251.68 3871,2277 D10.5@3871,2310 3871,2345 3845.41,2370.59 D10.3@3845.41,2404.49
DAC: U1.3 U16.3 | length 1284.7
  Top Layer w6: v1(3234.45,2358.51) 3234.45,2274.56 3285.81,2223.21 3285.81,2172.83 3280,2167.02 v1(3280,2140) ; v1(3275,2049) 3262,2036 3262,1873 3294.54,1840.46 U16.3@3324.05,1840.46
  Top Layer w8: v1(2771.65,2137.79) 2793.41,2137.79 2799.32,2143.7 U1.3@2832.68,2143.7
  Bottom Layer w6: v1(2771.65,2137.79) 2771.65,2154.65 2793,2176 2793,2189.02 2813,2209.02 2813,2306.92 2864.47,2358.39 3203,2358.39 3203.12,2358.51 v1(3234.45,2358.51) ; v1(3275,2049) 3277.21,2051.21 3277.21,2107 3280,2109.79 v1(3280,2140)
DISP_BUSY: CON2.16 U1.15 | length 854.7
  Top Layer w8: v1(2935,1809) U1.15@2935.04,1903.54
  Bottom Layer w8: v1(2935,1809) 2957.62,1809 2972.44,1794.17 3007.51,1794.17 3022.15,1779.53 3048.04,1779.53 3066.93,1760.64 3105.5,1760.64 3119.24,1746.91 3146.42,1746.91 3154.23,1754.72 3213.15,1754.72 3330.47,1637.39 3496.39,1637.39 3561.76,1702.76 CON2.16@3590.55,1702.76
DISP_CS: CON2.13 U1.22 | length 721.4
  Top Layer w8: U1.22@3072.83,1903.54 3072.83,1868.11 3078.74,1862.2 v1(3078.74,1791.34)
  Bottom Layer w8: v1(3078.74,1791.34) 3080.27,1789.81 3087.15,1789.81 3101.62,1804.28 3118.86,1804.28 3121.6,1801.53 3221.49,1801.53 3346.63,1676.39 3475.6,1676.39 3561.02,1761.81 CON2.13@3590.55,1761.81